# EAGLE board Buck V1 (EAGLE 9.4.2)

Size 160 x 100 mm. Coordinates in mm from the lower left corner, seen from the top.
Outline: 0,0 160,0 160,100 0,100 0,0
Copper layers (1*16): Top 0.035mm / dielectric 1.5mm / Bottom 0.035mm
Design rules "default": minimum track width 6mil, minimum drill 0.35mm, track to track 6mil, track to pad 6mil, pad to pad 6mil, via to via 6mil, smd to smd 6mil, copper to edge 40mil, drill to drill 6mil, minimum pad ring 10mil, minimum via ring 8mil, stop-mask expansion 4mil, vias tented up to drill 0mil, thermal gap 10mil

## Footprints (pad centres in the part's own frame; a part is rotated, then mirrored left to right if it is on the bottom)
C0603 = smd 1.1 x 1: 1 -0.85,0; 2 0.85,0
C1206 = smd 1.6 x 1.8: 1 -1.4,0; 2 1.4,0
CAP_PANASONIC_H13 = smd 6 x 2: P$1 -5,0; P$2 5,0
C0805 = smd 1.3 x 1.5: 1 -0.95,0; 2 0.95,0
SOD123 = smd 1.4 x 1.4: A 1.9,0; C -1.9,0
SOD-123 = smd 1.2 x 0.7: A 1.85,0; C -1.85,0
17.5X17.5_INDUCTOR_SMD = smd 5 x 13: 1 0,0; 2 17,0
D2PAK = smd 1.93 x 3.81: 1 -2.55,-8.25; 3 2.55,-8.25 | smd 10.3 x 8.9: 2 0,2.5
R0603 = smd 1 x 1.1: 1 -0.85,0; 2 0.85,0
R2512 = smd 1.8 x 3.2: 1 -2.8,0; 2 2.8,0
PWP0020A = smd 1.4 x 0.45: 1 -2.95,2.925; 2 -2.95,2.275; 3 -2.95,1.625; 4 -2.95,0.975; 5 -2.95,0.325; 6 -2.95,-0.325; 7 -2.95,-0.975; 8 -2.95,-1.625; 9 -2.95,-2.275; 10 -2.95,-2.925; 11 2.95,-2.925; 12 2.95,-2.275; 13 2.95,-1.625; 14 2.95,-0.975; 15 2.95,-0.325; 16 2.95,0.325; 17 2.95,0.975; 18 2.95,1.625; 19 2.95,2.275; 20 2.95,2.925 | smd 3.4 x 6.5: 21 0,0

## Placement (x,y rotation side)
C_BOOT  470 nF 50V  [C0603]  2.54,-15.24 0 top  (outside the outline)
C_COMP1  1.2 nF  [C0603]  -58.42,-119.38 0 top  (outside the outline)
C_COMP2  82 pF  [C0603]  -58.42,-123.19 0 top  (outside the outline)
C_IN1  10 uF  [C1206]  -57.15,-156.21 0 top  (outside the outline)
C_IN2  10 uF  [C1206]  -57.15,-162.56 0 top  (outside the outline)
C_IN3  10 uF  [C1206]  -57.15,-168.91 0 top  (outside the outline)
C_IN4  10 uF  [C1206]  -57.15,-175.26 0 top  (outside the outline)
C_INS1  100 nF  [C0603]  -58.42,-151.13 0 top  (outside the outline)
C_OUT  470 uF  [CAP_PANASONIC_H13]  8.89,-76.2 0 top  (outside the outline)
C_OUTS1  1 uF  [C0805]  2.54,-59.69 0 top  (outside the outline)
C_OUTS2  1 uF  [C0805]  2.54,-66.04 0 top  (outside the outline)
C_RAMP  820pF 50V  [C0603]  2.54,-33.02 0 top  (outside the outline)
C_RES  1 uF  [C0603]  -58.42,-140.97 0 top  (outside the outline)
C_SS  100 nF  [C0603]  -58.42,-146.05 0 top  (outside the outline)
C_VCC  1 UF 25V  [C0603]  2.54,-10.16 0 top  (outside the outline)
D_BOOT  PMEG10010ELRX  [SOD123]  3.81,-3.81 0 top  (outside the outline)
D_IN  IN4148  [SOD-123]  -57.15,-85.09 0 top  (outside the outline)
L1  [17.5X17.5_INDUCTOR_SMD]  3.81,-46.99 0 top  (outside the outline)
Q1  IRF3205STRLPBF  [D2PAK]  -7.62,-72.39 0 top  (outside the outline)
Q2  IRF3205STRLPBF  [D2PAK]  -22.86,-72.39 0 top  (outside the outline)
Q3  IRF3205STRLPBF  [D2PAK]  -38.1,-72.39 0 top  (outside the outline)
Q4  IRF3205STRLPBF  [D2PAK]  -53.34,-72.39 0 top  (outside the outline)
R_COMP  28.7 K  [R0603]  -58.42,-127 0 top  (outside the outline)
R_DIS1  3.3 K  [R0603]  -58.42,-114.3 0 top  (outside the outline)
R_DIS2  56 K  [R0603]  -58.42,-109.22 0 top  (outside the outline)
R_FB  1 K  [R0603]  -58.42,-132.08 0 top  (outside the outline)
R_RAMP  180 KOhm  [R0603]  2.54,-27.94 0 top  (outside the outline)
R_SENSE  1W 5mOhm  [R2512]  5.08,-21.59 0 top  (outside the outline)
R_SHTDWN  1 K  [R0603]  -58.42,-99.06 0 top  (outside the outline)
R_T  12.1 K  [R0603]  -58.42,-135.89 0 top  (outside the outline)
R_UV1  3.3 K  [R0603]  -58.42,-104.14 0 top  (outside the outline)
R_UV2  56 K  [R0603]  -58.42,-90.17 0 top  (outside the outline)
R_VOUT1  1 K  [R0603]  -58.42,-185.42 0 top  (outside the outline)
R_VOUT2  5 K  [R0603]  -58.42,-181.61 0 top  (outside the outline)
U1  Value  [PWP0020A]  59.69,57.15 0 top

## Library data of the parts
C_BOOT C_OUTS1 C_OUTS2 C_RAMP C_VCC = rcl; SPICEPREFIX: C
C_COMP1 C_COMP2 C_IN1-C_IN4 C_INS1 C_RES C_SS R_COMP R_DIS1 R_DIS2 R_FB R_SHTDWN R_T R_UV1 R_UV2 R_VOUT1 R_VOUT2 = rcl
C_OUT L1 = custom-parts
D_BOOT = diode
D_IN = adafruit
Q1-Q4 = mixed_components
R_RAMP R_SENSE = rcl; SPICEPREFIX: R
U1 = AcceleratedDesigns_Lib; MANUFACTURER: Texas Instruments; PARTNUMBER: LM5117PMHXNOPB; REFDES: RefDes; TYPE: TYPE

## Nets
ARD_CURRENT: U1.10
ARD_FEEDBACK: R_FB.1
ARD_SHUTDOWN: R_SHTDWN.1
ARD_VOUT: R_VOUT1.2 R_VOUT2.1
GND: C_IN1.2 C_IN2.2 C_IN3.2 C_IN4.2 C_INS1.2 C_OUT.P$1 C_OUTS1.2 C_OUTS2.2 C_RAMP.2 C_RES.2 C_SS.2 C_VCC.2 R_DIS1.2 R_SENSE.2 R_T.1 R_UV1.2 R_VOUT1.1 U1.6 U1.13 U1.14 U1.21
N$1: C_VCC.1 D_BOOT.A U1.2 U1.16
N$2: C_BOOT.1 D_BOOT.C U1.19
N$3: C_BOOT.2 L1.1 Q1.3 Q2.2 Q3.2 Q4.3 R_RAMP.2 U1.17
N$4: Q2.3 Q3.3 R_SENSE.1 U1.12
N$5: C_RAMP.1 R_RAMP.1 U1.11
N$6: C_OUT.P$2 C_OUTS1.1 C_OUTS2.1 L1.2 R_VOUT2.2
N$7: Q2.1 Q3.1 U1.15
N$8: Q1.1 Q4.1 U1.18
N$9: C_COMP1.2 R_COMP.2
N$10: D_IN.C U1.20
N$11: R_SHTDWN.2 R_UV1.1 R_UV2.1 U1.1
N$12: C_IN1.1 C_IN2.1 C_IN3.1 C_IN4.1 C_INS1.1 D_IN.A Q1.2 Q4.2 R_DIS2.2 R_UV2.2
N$13: R_DIS1.1 R_DIS2.1 U1.7
N$14: C_COMP1.1 C_COMP2.1 U1.9
N$15: C_COMP2.2 R_COMP.1 R_FB.2 U1.8
N$16: R_T.2 U1.5
N$17: C_RES.1 U1.3
N$18: C_SS.1 U1.4

## Tracks (layer width: path | path; a pad name or v marks a point on that pad's centre or on a via)
ARD_VOUT  (1 unrouted)
GND  (20 unrouted)
N$1  (3 unrouted)
N$2  (2 unrouted)
N$3  (7 unrouted)
N$4  (3 unrouted)
N$5  (2 unrouted)
N$6  (4 unrouted)
N$7  (2 unrouted)
N$8  (2 unrouted)
N$9  (1 unrouted)
N$10  (1 unrouted)
N$11  (3 unrouted)
N$12  (9 unrouted)
N$13  (2 unrouted)
N$14  (2 unrouted)
N$15  (3 unrouted)
N$16  (1 unrouted)
N$17  (1 unrouted)
N$18  (1 unrouted)